# EAGLE board SparkFun RTK Facet - Retention Plate (EAGLE 9.6.2)

Size 106 x 58 mm. Coordinates in mm from the lower left corner, seen from the top.
Outline: 0,0 0,58 106,58 106,0 0,0
Copper layers (1*16): Top 0.035mm / dielectric 1.5mm / Bottom 0.035mm
Design rules "SparkFun-2-layer-TIGHT": minimum track width 7mil, minimum drill 15mil, track to track 7mil, track to pad 7mil, pad to pad 7mil, via to via 7mil, smd to smd 7mil, copper to edge 7mil, drill to drill 7mil, minimum pad ring 7mil, minimum via ring 7mil, stop-mask expansion 4mil, vias tented up to drill 25mil, thermal gap 10mil
Net classes: 0 default: width 0.127 mm; 1 power: width 0.178 mm
Holes 2.3 mm at 93.98,4 10.1,4 10.1,54 93.98,54

## Placement (x,y rotation side)
FRAME1  FRAME-LETTER  [CREATIVE_COMMONS]  -2.57,-29.5 0 top  (outside the outline)
LOGO3  OSHW-LOGOMINI  [OSHW-LOGO-MINI]  61,2 0 top
LOGO5  SFE_LOGO_NAME_FLAME.1_INCH  [SFE_LOGO_NAME_FLAME_.1]  53,10 0 top
U$1  [RETENTION_PLATE1]  53,6 0 top
U$2  [RTK_FACET0]  53,8 0 top
U$3  [ORDERING_INSTRUCTIONS]  142.24,50.8 0 top  (outside the outline)
U$4  [RTK5#SVG0]  53,29 0 top

## Library data of the parts
FRAME1 LOGO3 LOGO5 U$3 = SparkFun-Aesthetics
U$1 U$2 U$4 = output

## Text on the board
Top: TOP-LAYER | v11
Bottom: BOTTOM-LAYER
tDocu: 1.6mm PCB Thickness